# Altium PCB LimeSDR-Mini_2v5_Rounded.PcbDoc (part 2 of 7)
Units mm, origin at the board's own origin, x right, y up, seen from the top; angles counter-clockwise.
Board outline 69 x 31.37 mm, 8 copper layers (Top, L2, L3, L4, L5, L6, L7, Bottom), stack 1.555 mm thick; 439 components, 294 nets, 1986 pads, 831 vias.
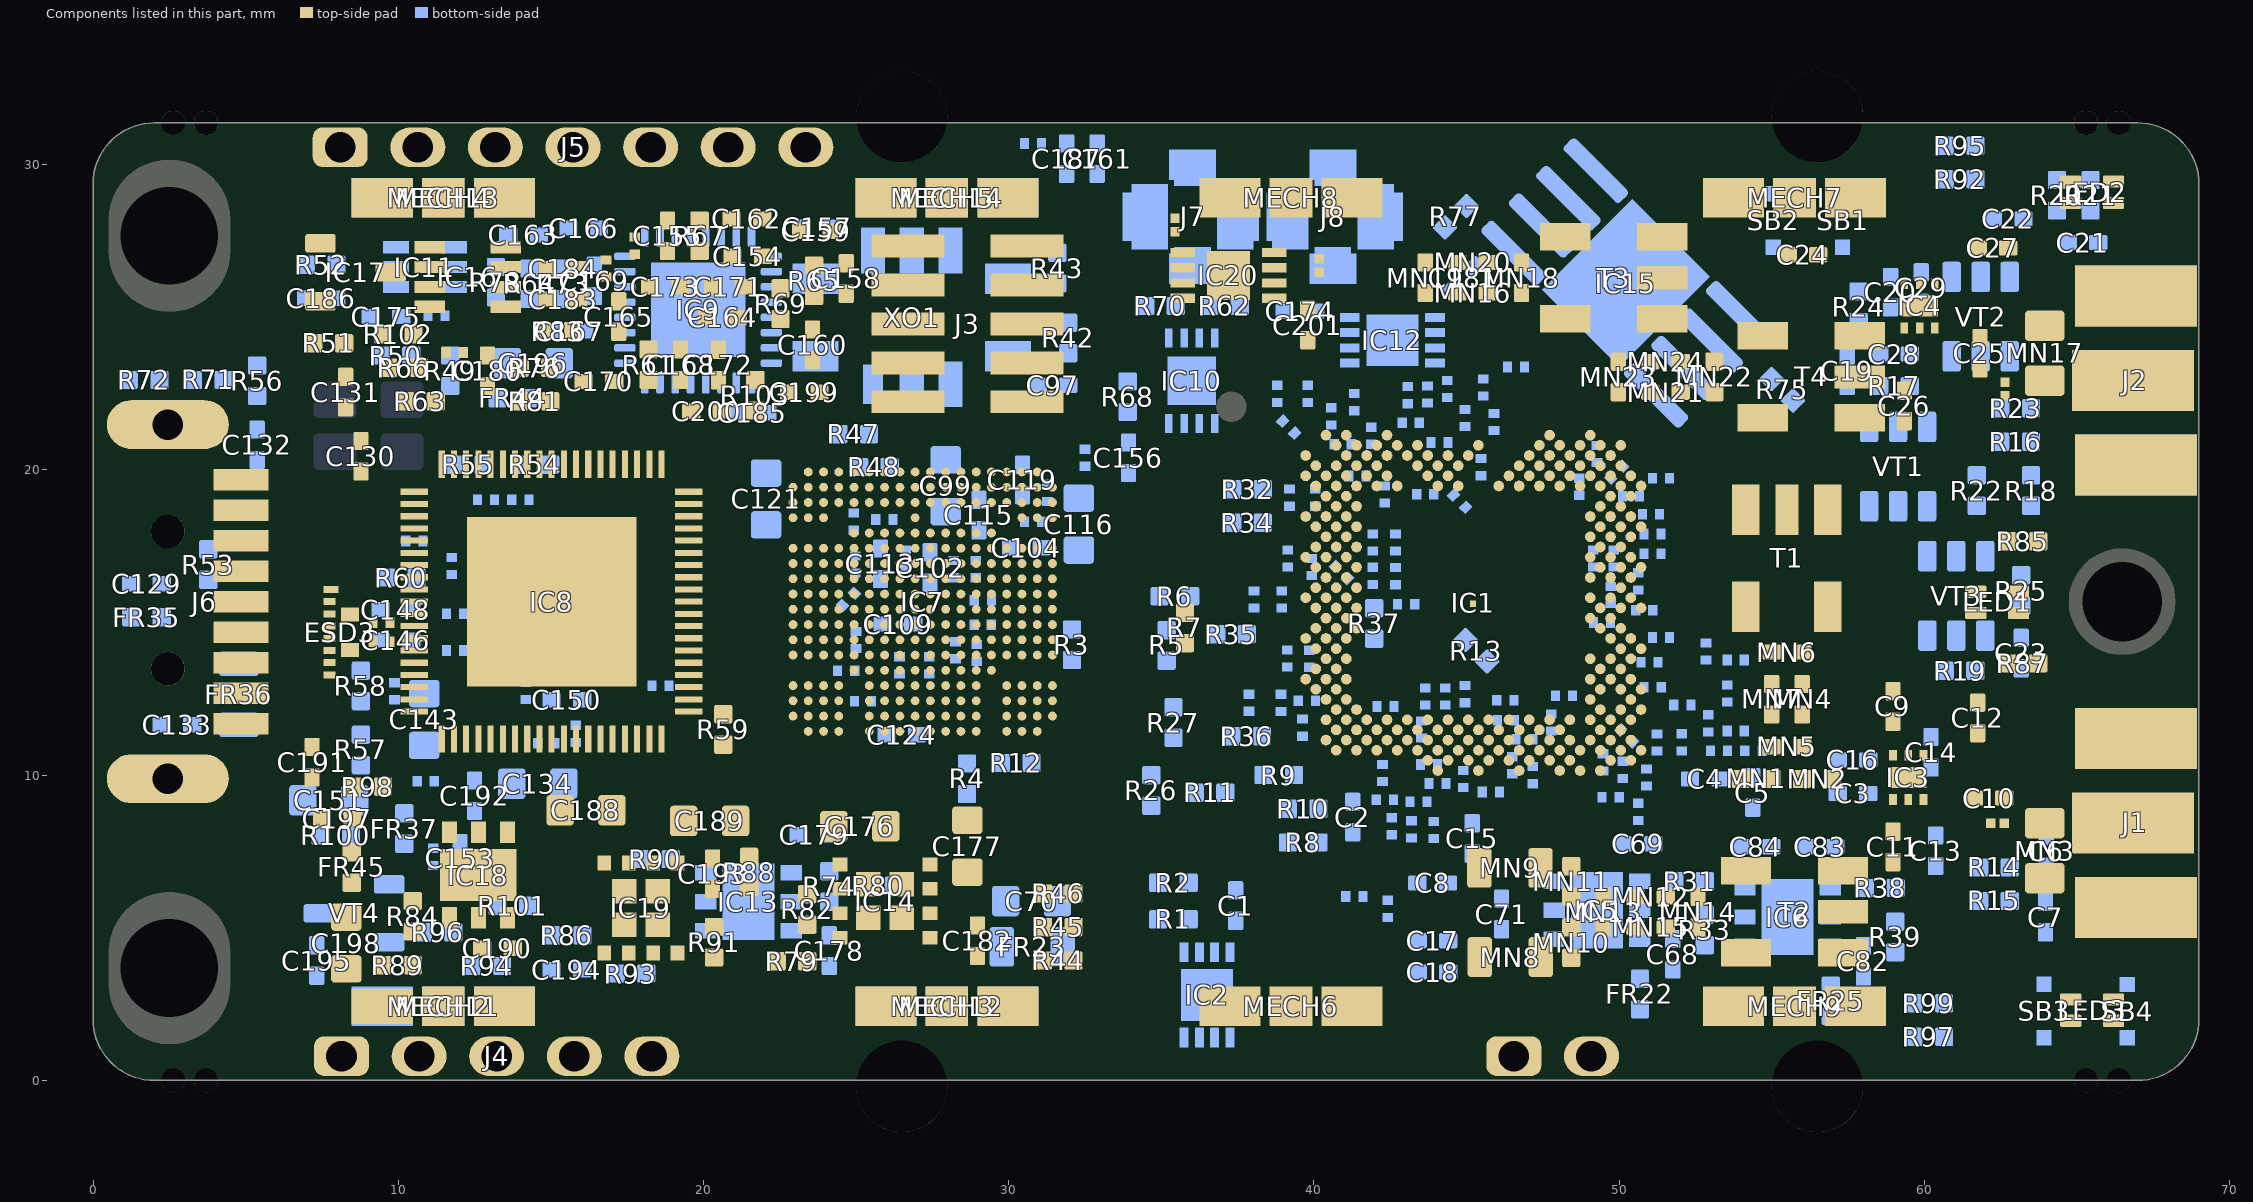
[diagram p8: the components of this part, seen from the top]

## Footprints (in the part's own frame and the unit in brackets; to place one, negate y for a bottom-side part, rotate by r counter-clockwise, add the part's x,y. Pads: shape width x height; smd on the part's side, far side on the other; paste and mask are expansions set on the pad) (continued)
LFE5U-25F-8MG285C_LATTICE_FPGA [mm] "285-ball csfBGA (MG285)"
  round 0.29 smd mask+0.05: A2(-3.75,4.25) A3(-3.25,4.25) A4(-2.75,4.25) A6(-1.75,4.25) A7(-1.25,4.25) A8(-0.75,4.25) A9(-0.25,4.25) A10(0.25,4.25) A11(0.75,4.25) A12(1.25,4.25) A13(1.75,4.25) A15(2.75,4.25) A16(3.25,4.25) A17(3.75,4.25) B1(-4.25,3.75) B2(-3.75,3.75) B3(-3.25,3.75) B4(-2.75,3.75) B6(-1.75,3.75) B7(-1.25,3.75) B8(-0.75,3.75) B9(-0.25,3.75) B10(0.25,3.75) B11(0.75,3.75) B12(1.25,3.75) B13(1.75,3.75) B15(2.75,3.75) B16(3.25,3.75) B17(3.75,3.75) B18(4.25,3.75) C1(-4.25,3.25) C2(-3.75,3.25) C3(-3.25,3.25) C4(-2.75,3.25) C6(-1.75,3.25) C7(-1.25,3.25) C8(-0.75,3.25) C9(-0.25,3.25) C10(0.25,3.25) C11(0.75,3.25) C12(1.25,3.25) C13(1.75,3.25) C15(2.75,3.25) C16(3.25,3.25) C17(3.75,3.25) C18(4.25,3.25) D1(-4.25,2.75) D2(-3.75,2.75) D3(-3.25,2.75) D4(-2.75,2.75) D6(-1.75,2.75) D7(-1.25,2.75) D8(-0.75,2.75) D9(-0.25,2.75) D10(0.25,2.75) D11(0.75,2.75) D12(1.25,2.75) D13(1.75,2.75) D15(2.75,2.75) D16(3.25,2.75) D17(3.75,2.75) D18(4.25,2.75) E5(-2.25,2.25) E6(-1.75,2.25) E7(-1.25,2.25) E8(-0.75,2.25) E9(-0.25,2.25) E10(0.25,2.25) E11(0.75,2.25) E12(1.25,2.25) E13(1.75,2.25) E14(2.25,2.25) F1(-4.25,1.75) F2(-3.75,1.75) F3(-3.25,1.75) F4(-2.75,1.75) F5(-2.25,1.75) F6(-1.75,1.75) F7(-1.25,1.75) F8(-0.75,1.75) F9(-0.25,1.75) F10(0.25,1.75) F11(0.75,1.75) F12(1.25,1.75) F13(1.75,1.75) F14(2.25,1.75) F15(2.75,1.75) F16(3.25,1.75) F17(3.75,1.75) F18(4.25,1.75) G1(-4.25,1.25) G2(-3.75,1.25) G3(-3.25,1.25) G4(-2.75,1.25) G5(-2.25,1.25) G6(-1.75,1.25) G7(-1.25,1.25) G8(-0.75,1.25) G9(-0.25,1.25) G10(0.25,1.25) G11(0.75,1.25) G12(1.25,1.25) G13(1.75,1.25) G14(2.25,1.25) G15(2.75,1.25) G16(3.25,1.25) G17(3.75,1.25) G18(4.25,1.25) H1(-4.25,0.75) H2(-3.75,0.75) H3(-3.25,0.75) H4(-2.75,0.75) H5(-2.25,0.75) H6(-1.75,0.75) H7(-1.25,0.75) H8(-0.75,0.75) H9(-0.25,0.75) H10(0.25,0.75) H11(0.75,0.75) H12(1.25,0.75) H13(1.75,0.75) H14(2.25,0.75) H15(2.75,0.75) H16(3.25,0.75) H17(3.75,0.75) H18(4.25,0.75) J1(-4.25,0.25) J2(-3.75,0.25) J3(-3.25,0.25) J4(-2.75,0.25) J5(-2.25,0.25) J6(-1.75,0.25) J7(-1.25,0.25) J8(-0.75,0.25) J9(-0.25,0.25) J10(0.25,0.25) J11(0.75,0.25) J12(1.25,0.25) J13(1.75,0.25) J14(2.25,0.25) J15(2.75,0.25) J16(3.25,0.25) J17(3.75,0.25) J18(4.25,0.25) K1(-4.25,-0.25) K2(-3.75,-0.25) K3(-3.25,-0.25) K4(-2.75,-0.25) K5(-2.25,-0.25) K6(-1.75,-0.25) K7(-1.25,-0.25) K8(-0.75,-0.25) K9(-0.25,-0.25) K10(0.25,-0.25) K11(0.75,-0.25) K12(1.25,-0.25) K13(1.75,-0.25) K14(2.25,-0.25) K15(2.75,-0.25) K16(3.25,-0.25) K17(3.75,-0.25) K18(4.25,-0.25) L1(-4.25,-0.75) L2(-3.75,-0.75) L3(-3.25,-0.75) L4(-2.75,-0.75) L5(-2.25,-0.75) L6(-1.75,-0.75) L7(-1.25,-0.75) L8(-0.75,-0.75) L9(-0.25,-0.75) L10(0.25,-0.75) L11(0.75,-0.75) L12(1.25,-0.75) L13(1.75,-0.75) L14(2.25,-0.75) L15(2.75,-0.75) L16(3.25,-0.75) L17(3.75,-0.75) L18(4.25,-0.75) M1(-4.25,-1.25) M2(-3.75,-1.25) M3(-3.25,-1.25) M4(-2.75,-1.25) M5(-2.25,-1.25) M6(-1.75,-1.25) M7(-1.25,-1.25) M8(-0.75,-1.25) M9(-0.25,-1.25) M10(0.25,-1.25) M11(0.75,-1.25) M12(1.25,-1.25) M13(1.75,-1.25) M14(2.25,-1.25) M15(2.75,-1.25) M16(3.25,-1.25) M17(3.75,-1.25) M18(4.25,-1.25) N1(-4.25,-1.75) N2(-3.75,-1.75) N3(-3.25,-1.75) N4(-2.75,-1.75) N5(-2.25,-1.75) N6(-1.75,-1.75) N7(-1.25,-1.75) N8(-0.75,-1.75) N9(-0.25,-1.75) N10(0.25,-1.75) N11(0.75,-1.75) N12(1.25,-1.75) N13(1.75,-1.75) N14(2.25,-1.75) N15(2.75,-1.75) N16(3.25,-1.75) N17(3.75,-1.75) N18(4.25,-1.75) P5(-2.25,-2.25) P6(-1.75,-2.25) P7(-1.25,-2.25) P8(-0.75,-2.25) P9(-0.25,-2.25) P10(0.25,-2.25) P11(0.75,-2.25) P12(1.25,-2.25) P13(1.75,-2.25) P14(2.25,-2.25) R1(-4.25,-2.75) R2(-3.75,-2.75) R3(-3.25,-2.75) R10(0.25,-2.75) R16(3.25,-2.75) R17(3.75,-2.75) R18(4.25,-2.75) T1(-4.25,-3.25) T2(-3.75,-3.25) T3(-3.25,-3.25) T4(-2.75,-3.25) T5(-2.25,-3.25) T6(-1.75,-3.25) T7(-1.25,-3.25) T8(-0.75,-3.25) T9(-0.25,-3.25) T10(0.25,-3.25) T11(0.75,-3.25) T12(1.25,-3.25) T13(1.75,-3.25) T14(2.25,-3.25) T15(2.75,-3.25) T16(3.25,-3.25) T17(3.75,-3.25) T18(4.25,-3.25) U1(-4.25,-3.75) U2(-3.75,-3.75) U3(-3.25,-3.75) U4(-2.75,-3.75) U5(-2.25,-3.75) U6(-1.75,-3.75) U7(-1.25,-3.75) U8(-0.75,-3.75) U9(-0.25,-3.75) U10(0.25,-3.75) U11(0.75,-3.75) U12(1.25,-3.75) U13(1.75,-3.75) U14(2.25,-3.75) U15(2.75,-3.75) U16(3.25,-3.75) U17(3.75,-3.75) U18(4.25,-3.75) V2(-3.75,-4.25) V3(-3.25,-4.25) V4(-2.75,-4.25) V5(-2.25,-4.25) V6(-1.75,-4.25) V7(-1.25,-4.25) V8(-0.75,-4.25) V9(-0.25,-4.25) V10(0.25,-4.25) V11(0.75,-4.25) V12(1.25,-4.25) V13(1.75,-4.25) V14(2.25,-4.25) V15(2.75,-4.25) V16(3.25,-4.25) V17(3.75,-4.25)
  silkscreen extent -5.1,-5 5,5.1, body extent -5,-5 5,5, height 1.3
LMK00101_WQFN32_r1 [mm] "QFN, 24-Leads, Body 4,00x4,00mm, Pitch 0,50mm, Thermal Pad 2,55x2,55mm, IPC Medium Density"
  rrect50% 0.7x0.25 smd mask+0.05: 1(-2.4,1.75) 2(-2.4,1.25) 3(-2.4,0.75) 4(-2.4,0.25) 5(-2.4,-0.25) 6(-2.4,-0.75) 7(-2.4,-1.25) 8(-2.4,-1.75) 17(2.4,-1.75) 18(2.4,-1.25) 19(2.4,-0.75) 20(2.4,-0.25) 21(2.4,0.25) 22(2.4,0.75) 23(2.4,1.25) 24(2.4,1.75)
  rect 3.1x3.1 smd mask+0.05: 4(0,0)
  rrect50% 0.25x0.7 smd mask+0.05: 9(-1.75,-2.4) 10(-1.25,-2.4) 11(-0.75,-2.4) 12(-0.25,-2.4) 13(0.25,-2.4) 14(0.75,-2.4) 15(1.25,-2.4) 16(1.75,-2.4) 25(1.75,2.4) 26(1.25,2.4) 27(0.75,2.4) 28(0.25,2.4) 29(-0.25,2.4) 30(-0.75,2.4) 31(-1.25,2.4) 32(-1.75,2.4)
  silkscreen extent -2.8,-2.8 2.8,2.8, body extent -2.52,-2.51 2.5,2.51, height 0.8
LMS7002M_v5 [mm] "LMS7002 without AM2 pad (internally unconnected)"
  round 0.35 smd mask+0: A5(-3.998,5.49) A7(-3.332,5.49) A9(-2.666,5.49) A13(-1.334,5.49) A17(-0.002,5.49) A21(1.33,5.49) AA1(-5.33,-1.17) AA3(-4.664,-1.17) AA5(-3.998,-1.17) AA29(3.994,-1.17) AA31(4.66,-1.17) AA33(5.326,-1.17) AB2(-4.997,-1.503) AB4(-4.331,-1.503) AB6(-3.665,-1.503) AB30(4.327,-1.503) AB32(4.993,-1.503) AB34(5.659,-1.503) AC3(-4.664,-1.836) AC5(-3.998,-1.836) AC29(3.994,-1.836) AC31(4.66,-1.836) AC33(5.326,-1.836) AD2(-4.997,-2.169) AD4(-4.331,-2.169) AD6(-3.665,-2.169) AD30(4.327,-2.169) AD32(4.993,-2.169) AE1(-5.33,-2.502) AE3(-4.664,-2.502) AE5(-3.998,-2.502) AE29(3.994,-2.502) AE31(4.66,-2.502) AE33(5.326,-2.502) AF2(-4.997,-2.835) AF4(-4.331,-2.835) AF6(-3.665,-2.835) AF30(4.327,-2.835) AF32(4.993,-2.835) AF34(5.659,-2.835) AG3(-4.664,-3.168) AG5(-3.998,-3.168) AG29(3.994,-3.168) AG31(4.66,-3.168) AG33(5.326,-3.168) AH2(-4.997,-3.501) AH4(-4.331,-3.501) AH30(4.327,-3.501) AH32(4.993,-3.501) AJ1(-5.33,-3.834) AJ3(-4.664,-3.834) AJ5(-3.998,-3.834) AJ7(-3.332,-3.834) AJ9(-2.666,-3.834) AJ11(-2,-3.834) AJ13(-1.334,-3.834) AJ15(-0.668,-3.834) AJ19(0.664,-3.834) AJ21(1.33,-3.834) AJ25(2.662,-3.834) AJ27(3.328,-3.834) AJ29(3.994,-3.834) AJ31(4.66,-3.834) AJ33(5.326,-3.834) AK2(-4.997,-4.167) AK4(-4.331,-4.167) AK6(-3.665,-4.167) AK8(-2.999,-4.167) AK10(-2.333,-4.167) AK12(-1.667,-4.167) AK14(-1.001,-4.167) AK20(0.997,-4.167) AK22(1.663,-4.167) AK26(2.995,-4.167) AK28(3.661,-4.167) AK30(4.327,-4.167) AK32(4.993,-4.167) AK34(5.659,-4.167) AL3(-4.664,-4.5) AL5(-3.998,-4.5) AL7(-3.332,-4.5) AL9(-2.666,-4.5) AL11(-2,-4.5) AL13(-1.334,-4.5) AL19(0.664,-4.5) AL21(1.33,-4.5) AL23(1.996,-4.5) AL27(3.328,-4.5) AL29(3.994,-4.5) AL31(4.66,-4.5) AL33(5.326,-4.5) AM4(-4.331,-4.833) AM6(-3.665,-4.833) AM8(-2.999,-4.833) AM10(-2.333,-4.833) AM12(-1.667,-4.833) AM18(0.331,-4.833) AM20(0.997,-4.833) AM22(1.663,-4.833) AM24(2.329,-4.833) AM26(2.995,-4.833) AM28(3.661,-4.833) AM30(4.327,-4.833) AM34(5.659,-4.833) AN3(-4.664,-5.166) AN5(-3.998,-5.166) AN7(-3.332,-5.166) AN9(-2.666,-5.166) AN11(-2,-5.166) AN17(-0.002,-5.166) AN23(1.996,-5.166) AN25(2.662,-5.166) AN27(3.328,-5.166) AN29(3.994,-5.166) AN31(4.66,-5.166) AP6(-3.665,-5.499) AP10(-2.333,-5.499) AP26(2.995,-5.499) AP30(4.327,-5.499) AP32(4.993,-5.499) B2(-4.997,5.157) B4(-4.331,5.157) B8(-2.999,5.157) B10(-2.333,5.157) B12(-1.667,5.157) B14(-1.001,5.157) B16(-0.335,5.157) B18(0.331,5.157) B20(0.997,5.157) B22(1.663,5.157) C1(-5.33,4.824) C3(-4.664,4.824) C5(-3.998,4.824) C7(-3.332,4.824) C9(-2.666,4.824) C11(-2,4.824) C13(-1.334,4.824) C15(-0.668,4.824) C17(-0.002,4.824) C19(0.664,4.824) C21(1.33,4.824) C23(1.996,4.824) C25(2.662,4.824) C27(3.328,4.824) C29(3.994,4.824) C31(4.66,4.824) D2(-4.997,4.491) D4(-4.331,4.491) D6(-3.665,4.491) D8(-2.999,4.491) D10(-2.333,4.491) D12(-1.667,4.491) D14(-1.001,4.491) D16(-0.335,4.491) D18(0.331,4.491) D20(0.997,4.491) D22(1.663,4.491) D24(2.329,4.491) D26(2.995,4.491) D28(3.661,4.491) D30(4.327,4.491) D32(4.993,4.491) E3(-4.664,4.158) E5(-3.998,4.158) E9(-2.666,4.158) E11(-2,4.158) E13(-1.334,4.158) E15(-0.668,4.158) E17(-0.002,4.158) E19(0.664,4.158) E21(1.33,4.158) E23(1.996,4.158) E25(2.662,4.158) E27(3.328,4.158) E29(3.994,4.158) E31(4.66,4.158) F2(-4.997,3.825) F4(-4.331,3.825) F6(-3.665,3.825) F8(-2.999,3.825) F10(-2.333,3.825) F12(-1.667,3.825) F14(-1.001,3.825) F16(-0.335,3.825) F18(0.331,3.825) F20(0.997,3.825) F22(1.663,3.825) F24(2.329,3.825) F26(2.995,3.825) F28(3.661,3.825) F30(4.327,3.825) F32(4.993,3.825) G1(-5.33,3.492) G3(-4.664,3.492) G5(-3.998,3.492) G29(3.994,3.492) G31(4.66,3.492) H2(-4.997,3.159) H6(-3.665,3.159) H30(4.327,3.159) H32(4.993,3.159) J1(-5.33,2.826) J3(-4.664,2.826) J5(-3.998,2.826) J31(4.66,2.826) J33(5.326,2.826) K2(-4.997,2.493) K4(-4.331,2.493) K6(-3.665,2.493) K30(4.327,2.493) K32(4.993,2.493) K34(5.659,2.493) L3(-4.664,2.16) L5(-3.998,2.16) L31(4.66,2.16) L33(5.326,2.16) M2(-4.997,1.827) M4(-4.331,1.827) M6(-3.665,1.827) M30(4.327,1.827) M32(4.993,1.827) N1(-5.33,1.494) N3(-4.664,1.494) N31(4.66,1.494) N33(5.326,1.494) P2(-4.997,1.161) P4(-4.331,1.161) P30(4.327,1.161) P32(4.993,1.161) P34(5.659,1.161) R3(-4.664,0.828) R5(-3.998,0.828) R29(3.994,0.828) R31(4.66,0.828) R33(5.326,0.828) T4(-4.331,0.495) T6(-3.665,0.495) T30(4.327,0.495) T32(4.993,0.495) U1(-5.33,0.162) U3(-4.664,0.162) U5(-3.998,0.162) U29(3.994,0.162) U31(4.66,0.162) U33(5.326,0.162) V2(-4.997,-0.171) V4(-4.331,-0.171) V6(-3.665,-0.171) V30(4.327,-0.171) V32(4.993,-0.171) V34(5.659,-0.171) W3(-4.664,-0.504) W29(3.994,-0.504) W31(4.66,-0.504) W33(5.326,-0.504) Y2(-4.997,-0.837) Y4(-4.331,-0.837) Y6(-3.665,-0.837) Y30(4.327,-0.837) Y32(4.993,-0.837)
  rect 0.2x0.2 smd: GND(0.175,0.025)
  Top region: -3.325,-3.5 3.675,-3.5 3.675,3.5 -3.325,3.5
  silkscreen extent -6.1,-6.3 6.4,6.2, body extent -5.6,-5.75 5.9,5.75, height 0.97
LMZ20501SILR_DC-DC_8-SMD [mm]
  rect 0.5x0.45 smd mask+0.05: 1(-1.475,1.2) 2(-1.475,0.4) 3(-1.475,-0.4) 4(-1.475,-1.2) 5(1.475,-1.2) 6(1.475,-0.4) 7(1.475,0.4) 8(1.475,1.2)
  rect 0.8x0.8 smd mask+0.05: PAD(-0.55,0.55) PAD(-0.55,-0.55) PAD(0.55,-0.55) PAD(0.55,0.55)
  silkscreen extent -2.17,-1.85 1.88,1.85, body extent -1.9,-1.9 1.9,1.9, height 0.25
M24128-DFMC6TG [mm] "8-UFDFPN (2x3)"
  rect 0.65x0.3 smd mask+0.05: 1(-1.4,0.75) 2(-1.4,0.25) 3(-1.4,-0.25) 4(-1.4,-0.75) 5(1.4,-0.75) 6(1.4,-0.25) 7(1.4,0.25) 8(1.4,0.75)
  rect 1.7x1.7 smd mask+0.05: PAD(0,0)
  silkscreen extent -2.06,-1.1 0.9,1.1, body extent -1.52,-1.01 1.52,0.99, height 0.9
MMCX_UFL_conn_u#1 [mm]
  rect 1.2x1.2 smd mask+0.05: 1(0,1.6) 2(0,-1.6)
  rect 1.55x1 smd mask+0.05: 1(0,1.7) 2(0,-1.7)
  rect 1.2x1.6 smd mask+0.05: 2(-1.7,0)
  rect 1.2x2.15 smd mask+0.05: 2(-1.4,0) 2(1.4,0)
  rect 0.95x1.6 smd mask+0.05: 2(1.7,0)
  silkscreen extent -2.3,-2.2 2.3,2.2, body extent -1.5,-1.55 1.5,1.55, height 1.25
MMCX_UFL_conn_u#2 [mm]
  rect 1.2x1.2 smd mask+0.05: 1(0,1.6) 2(0,-1.6)
  rect 1.55x1 smd mask+0.05: 1(0,1.7) 2(0,-1.7)
  rect 0.95x1.6 smd mask+0.05: 2(-1.7,0)
  rect 1.2x2.15 smd mask+0.05: 2(-1.4,0) 2(1.4,0)
  rect 1.2x1.6 smd mask+0.05: 2(1.7,0)
  silkscreen extent -2.3,-2.2 2.3,2.2, body extent -1.5,-1.55 1.5,1.55, height 1.25
RES0201#1 [mm]
  rect 0.3x0.35 smd: 1(-0.28,0) 2(0.28,0)
  silkscreen extent -0.2,-0.33 0.2,0.33, body extent -0.3,-0.15 0.3,0.15, height 0.25
RES0201#2 [mm]
  rect 0.3x0.35 smd mask+0.05: 1(-0.28,0) 2(0.28,0)
  silkscreen extent -0.2,-0.33 0.2,0.33, body extent -0.3,-0.15 0.3,0.15, height 0.25
RES0402#1 [mm] "Chip Resistor, Body 1.0x0.5mm, EIA 0402, IPC Medium Density"
  round 0.2 on Mech14: 0(0,0)
  rrect20% 0.6x0.6 smd: 1(-0.5,0) 2(0.5,0)
  Top pour cut-out: -0.2,0.35 0.2,0.35 0.2,-0.35 -0.2,-0.35
  silkscreen extent -1.05,-0.55 1.05,0.55, body extent -0.52,-0.27 0.53,0.28, height 0.4
RES0402#2 [mm] "Chip Resistor, Body 1.0x0.5mm, EIA 0402, IPC Medium Density"
  round 0.2 on Mech15: 0(0,0)
  rrect20% 0.6x0.6 smd: 1(-0.5,0) 2(0.5,0)
  Top pour cut-out: -0.2,0.35 0.2,0.35 0.2,-0.35 -0.2,-0.35
  silkscreen extent -1.05,-0.55 1.05,0.55, body extent -0.52,-0.27 0.53,0.28, height 0.4
RES0805#1 [mm] "Chip Resistor, Body 2.0x1.2mm, 0805, IPC Medium Density"
  round 0.254 on Mech14: 0(0,0)
  rrect25% 0.8x1.3 smd: 1(-1,0) 2(1,0)
  Top pour cut-out: -0.6,0.75 0.6,0.75 0.6,-0.75 -0.6,-0.75
  silkscreen extent -0.38,-0.64 0.38,0.64, body extent -1.1,-0.67 1.1,0.68, height 0.69
RES0805#2 [mm] "Chip Resistor, Body 2.0x1.2mm, 0805, IPC Medium Density"
  round 0.254 on Mech15: 0(0,0)
  rrect25% 0.8x1.3 smd: 1(-1,0) 2(1,0)
  Top pour cut-out: -0.6,0.75 0.6,0.75 0.6,-0.75 -0.6,-0.75
  silkscreen extent -0.38,-0.64 0.38,0.64, body extent -1.1,-0.67 1.1,0.68, height 0.69
RES0805_0603 [mm] "Universal 0805 0603 footprint"
  round 0.254 on Mech15: 0(0,0)
  rrect25% 1x1.3 smd: 1(-0.9,0) 2(0.9,0)
  Top pour cut-out: -0.4,0.725 0.4,0.725 0.4,-0.775 -0.4,-0.775
  silkscreen extent -0.22,-0.7 0.23,0.7, body extent -1.1,-0.67 1.1,0.68, height 0.69
RFI_SHIELD_CLPS_MINI#1 [mm] "RFI SHIELD CLIP MINI TIN SMD, S0971-46R"
  rect 2x1.3 smd paste-2 mask+0.05: 1(-2,0)
  rect 1.4x1.3 smd paste-2 mask+0.05: 1(0,0)
  rect 2x1.15 smd paste-2 mask+0.05: 1(2,0)
  body extent -2.9,-0.5 2.9,0.5, height 1
RFI_SHIELD_CLPS_MINI#2 [mm] "RFI SHIELD CLIP MINI TIN SMD, S0971-46R"
  rect 2x1.3 smd paste-2 mask+0.05: 1(-2,0) 1(2,0)
  rect 1.4x1.3 smd paste-2 mask+0.05: 1(0,0)
  body extent -2.9,-0.5 2.9,0.5, height 1
RFI_SHIELD_CLPS_MINI#3 [mm] "RFI SHIELD CLIP MINI TIN SMD, S0971-46R"
  rect 2x1.3 smd paste+0 mask+0.05: 1(-2,0) 1(2,0)
  rect 1.4x1.3 smd paste+0 mask+0.05: 1(0,0)
  body extent -2.9,-0.5 2.9,0.5, height 1
RFI_SHIELD_CLPS_MINI#4 [mm] "RFI SHIELD CLIP MINI TIN SMD, S0971-46R"
  rect 2x1.3 smd mask+0.05: 1(-2,0) 1(2,0)
  rect 1.4x1.3 smd mask+0.05: 1(0,0)
  body extent -2.9,-0.5 2.9,0.5, height 1
S25FL164K_WSON8_DFN6 [mm] "WSON8 and DFN8 6x5mm compatible footprint"
  rrect50% 2.6x0.55 smd mask+0.05: 1(-3.3,1.905) 2(-3.3,0.635) 3(-3.3,-0.635) 4(-3.3,-1.905) 5(3.3,-1.905) 6(3.3,-0.635) 7(3.3,0.635) 8(3.3,1.905)
  rect 3.6x4.2 smd mask+0.05: PAD(0,0)
  silkscreen extent -4.72,-2.7 2,2.72, body extent -4.15,-2.73 3.95,2.73, height 1.75
SKY13411-374LF [mm]
  rect 0.35x0.25 smd mask+0.05: 1(-0.725,0.5) 2(-0.725,0) 3(-0.725,-0.5) 4(0.725,-0.5) 5(0.725,0) 6(0.725,0.5)
  rect 0.7x1.2 smd mask+0.05: PAD(0,0)
  silkscreen extent -1.14,-0.8 0.7,0.86, body extent -0.75,-0.75 0.75,0.75, height 0.48
SMA_CONNECTOR_BOARD_EDGE_SM [mm]
  rect 2x4 smd: 1(0,0) 2(-2.77,-0.1) 2(2.77,-0.1)
  rect 2x4 smd far side: 2(-2.77,-0.1) 2(2.77,-0.1)
  silkscreen extent -4.3,-1.9 4.3,2.5, body extent -3,-11.8 3,1.8, height 3.4
SOLDER_BRIDGE_TRIANGULAR_V2 [mm]
  round 0.254 on Mech14: 0(0,0.125)
  rect 0.5x0.5 smd mask+0.05: 1(0,-0.95) 2(0,0.8)
  Top region: 0,0.05 -0.625,-0.575 -0.625,-1.45 0,-1.45
  Top region: 0,0.225 -0.625,-0.4 -0.625,1.05 0,1.05
  Top region: 0,0.225 0.625,-0.4 0.625,1.05 0,1.05
  Top region: 0,0.05 0.625,-0.575 0.625,-1.45 0,-1.45
  silkscreen extent -0.77,-1.6 0.77,1.2, body extent -0.28,-0.52 0.27,0.53, height 0.4
SOT23-3 [mm] "SOT23, 3 pin"
  round 0.5 on Mech14: 0(0,0)
  rrect25% 1x0.6 smd: D(1.15,0) G(-1.15,0.95) S(-1.15,-0.95)
  silkscreen extent -1.25,-1.45 0.38,1.81, body extent -1.4,-1.45 1.4,1.45, height 1.29
SOT23-3_V3 [mm] "SOT23, 3 pin"
  round 0.5 on Mech15: 0(0,0)
  rrect25% 1x0.6 smd: 1(-1.15,0.95) 2(-1.15,-0.95) 3(1.15,0)
  silkscreen extent -1.2,-1.45 0.38,1.45, body extent -1.4,-1.45 1.4,1.45, height 1.29
SWD_10_pin [mm]
  rect 0.75x2.4 smd paste-2: 1(-2.55,-1.95) 2(-2.55,1.95) 3(-1.275,-1.95) 4(-1.275,1.95) 5(0,-1.95) 6(0,1.95) 7(1.275,-1.95) 8(1.275,1.95) 9(2.55,-1.95) 10(2.55,1.95)
  silkscreen extent -3.2,-3.4 3.2,3.4, body extent -3.17,-2.75 3.17,2.75, height 6.37
T604-040.0M_VCTCXO_CONNORWINFIELD [mm]
  rect 0.8x1.5 smd mask+0.07: 1(-1.27,-2.19) 2(0,-2.19) 6(1.27,2.19) 7(0,2.19) 8(-1.27,2.19)
  rect 0.65x1.3 smd mask+0.07: 3(1.27,-2.19)
  rect 1.5x1 smd mask+0.07: 4(3.155,-1.27) 5(3.155,1.27) 9(-3.155,1.27) 10(-3.155,-1.27)
  silkscreen extent -3.5,-3.02 3.5,2.5, body extent -3.65,-2.65 3.65,2.65, height 2.1
TC1-1-13MA+_JA4220-AL_ [mm] "Balun compatible with TC1-1-13MA+ and JA4220-AL_"
  rect 0.9x1.65 smd: 1(-1.345,1.59) 3(1.345,1.59) 4(1.345,-1.59) 6(-1.345,-1.59)
  rect 0.76x1.65 smd: 2(0,1.59)
  silkscreen extent -2,-0.6 2,0.7, body extent -1.27,-1.61 1.28,1.61, height 2.8
USB3A_SM [mm]
  rect 0.7x1.8 smd: 1(-3,-1.2) 2(-1,-1.2) 3(1,-1.2) 4(3,-1.2) 5(4,-1.2) 6(2,-1.2) 7(0,-1.2) 8(-2,-1.2) 9(-4,-1.2)
  oval 1.6x4 hole 1 slot 2.5 at 90 deg: 10(-5.8,1.2) 10(5.8,1.2)
  round 1.1 hole 1.1 unplated: 11(-2.2,1.2) 11(2.3,1.2)
  silkscreen extent -6.95,-2.55 7.05,3.6, body extent -6,-1.75 6,19, height 1.8
WURTHELECTRONIC_RF_SHIELD [mm] "Man. part nr.: 36003250"
  body extent 0,0 26.8,26.8, height 3.1
WurthElectronic_RF_shield [mm] "Man. part nr.: 36003250"
  body extent 0,0 26.8,26.8, height 3.1
ZVN4525E6_NMOS_SOT23-6 [mm]
  round 0.5 on Mech14: 0(0,0)
  rrect25% 1x0.6 smd: 1(-1.3,0.95) 2(-1.3,0) 3(-1.3,-0.95) 4(1.3,-0.95) 5(1.3,0) 6(1.3,0.95)
  silkscreen extent -1.42,-1.35 0.51,1.81, body extent -1.4,-1.45 1.4,1.45, height 1.44

## Part data
C1 C159 C164 C165 C194: library part Cap_0402, Capacitance=1, Capacitance Tolerance="± 10%", Ceramic Capacitor Case="0402 [1005 Metric]", Dielectric Characteristic=X6, Manufacturer=TDK, Manufacturer Part Number 1=C1005X5R1E105K050BC, Supplier Part Number 1=445-9066-1-ND, Voltage Rating=10, MSL=-, Part Description="1 µF ±10% 25V Ceramic Capacitor X5R 0402 (1005 Metric)", Product Range="TDK - C Series", RoHS=YES, Supplier 1=Digi-Key
  C194: Assembly Info=NF
C2: library part Cap_0402, Capacitance=10, Capacitance Tolerance="± 5%", Capacitor Case Style="0402 [1005 Metric]<!--FANDB--><div class=\"features-and-benefits-container\"></div>", Ceramic Capacitor Case="0402 [1005 Metric]", Dielectric Characteristic="C0G / NP0", Manufacturer=AVX, Manufacturer Part Number 1=04023A100JAT2A, Operating Temperature Max=125, Operating Temperature Min=-55, Supplier Part Number 1=2332478RL, Voltage Rating=25, Capacitance Tolerance ±="± 5%", MSL="MSL 1 - Unlimited", Packaging="Cut Tape", Part Description="10pF ±5% 25V C0G, NP0 Ceramic Capacitor -55°C ~ 125°C Surface Mount, MLCC 0402 (1005 Metric) 0.039\" L x 0.020\" W (1.00mm x 0.50mm)", Product Range=-, RoHS=YES, Supplier 1=Farnell, SVHC="No SVHC (16-Jun-2014)"
C3 C5 C7 C16 C17 C19 C20 C22 C23 C71 C84 C167 C168 C169 C170 C172 C173 C192: library part Cap_0402, Capacitance=100pF, Manufacturer=Yageo, Manufacturer Part Number 1=CC0402JRNPO9BN101, Operating Temperature="-55°C ~ 125°C", Package / Case="0402 (1005 Metric)", Ratings=-, Supplier Part Number 1=311-1024-1-ND, Temperature Coefficient="C0G, NP0", Tolerance=±5%, Voltage - Rated=50V, Applications="General Purpose", Category=Capacitors, Features=-, Height - Seated (Max)=-, Lead Spacing=-, Lead Style=-, Mounting Type="Surface Mount, MLCC", Packaging="Cut Tape (CT)", Part Description="100pF ±5% 50V C0G, NP0 Ceramic Capacitor -55°C ~ 125°C Surface Mount, MLCC 0402 (1005 Metric) 0.039\" L x 0.020\" W (1.00mm x 0.50mm)", RoHS="RoHS Compliant", Size / Dimension="0.039\" L x 0.020\" W (1.00mm x 0.50mm)", Supplier 1=Digi-Key, Thickness (Max)="0.022\" (0.55mm)"
  C7 C19 C20 C22 C71 C84 C192: Assembly Info=NF
C4 C6 C8 C15 C18 C21 C97 C153 C154 C155 C161 C162 C163 C166 C171 C185 C199 C200 MN12 MN15: library part Cap_0402, Capacitance="0.1 uF", Case Code - in=0402, Case Code - mm=1005, Case Height="0.5 mm", Case Length="1 mm", Dielectric=X7R, Manufacturer="Murata Electronics", Manufacturer Part Number=GRM155R71C104KA88D, Maximum Operating Temperature="+ 125 C", Minimum Operating Temperature="- 55 C", Operating Temperature Range="- 55 C to + 125 C", Package / Case="0402 (1005 metric)", Supplier Part Number 1=81-GRM155R71C104KA88, Temperature Coefficient / Code="+/- 15 %", Tolerance="10 %", Voltage Rating DC="16 V", Brand="Murata Electronics", Case Width="0.5 mm", Category="Multilayer Ceramic Capacitors MLCC - SMD/SMT", Manufacturer Part Number 1=GRM155R71C104KA88D, Minimum Order Quantity=1, Packaging=Reel, Part Description="0.10µF ±10% 16V X7R Ceramic Capacitor -55°C ~ 125°C Surface Mount, MLCC 0402 (1005 Metric) 0.039\" L x 0.020\" W (1.00mm x 0.50mm)", Product="General Type MLCCs", Product Category="Low & Medium Capacitance SMD Ceramic Chip Capacitors", Reeling=True, RoHS="RoHS Compliant", RoHS - Mouser=Y, Series=GRM, Standard Pack Qty=10000, Supplier 1=Mouser, Termination Style=SMD/SMT, Type="General Purpose MLCC"
  C6 C21: Assembly Info=NF
C9 C12 C24 C27 C158 C160: library part Cap_0402, Capacitance=47pF, Manufacturer="TDK Corporation", Manufacturer Part Number 1=GRM1555C1H470FA01D, Operating Temperature="-55°C ~ 125°C", Package / Case="0402 (1005 Metric)", Ratings=-, Supplier Part Number 1=490-6241-1-ND, Temperature Coefficient="C0G, NP0", Tolerance=±1%, Voltage - Rated=50V, Applications="General Purpose", Category=Capacitors, Features=-, Height - Seated (Max)=-, Lead Spacing=-, Lead Style=-, Mounting Type="Surface Mount, MLCC", Packaging="Cut Tape (CT)", Part Description="47pF ±1% 50V C0G, NP0 Ceramic Capacitor -55°C ~ 125°C Surface Mount, MLCC 0402 (1005 Metric) 0.039\" L x 0.020\" W (1.00mm x 0.50mm)", RoHS="RoHS Compliant", Size / Dimension="0.039\" L x 0.020\" W (1.00mm x 0.50mm)", Supplier 1=Digi-Key, Thickness (Max)="0.022\" (0.55mm)"
  C158 C160: Assembly Info=NF
C10 C11 C25 C26 MN21 MN24: library part Cap_0402, Manufacturer="Murata Electronics North America", Manufacturer Part Number 1=GRM1555C1H511JA01D, Operating Temperature="-55°C ~ 125°C", Package / Case="0402 (1005 Metric)", Ratings=-, Supplier Part Number 1=490-3237-1-ND, Temperature Coefficient="C0G, NP0", Tolerance=±5%, Voltage - Rated=50V, Applications="General Purpose", Capacitance=510pF, Category=Capacitors, Features=-, Height - Seated (Max)=-, Lead Spacing=-, Lead Style=-, Mounting Type="Surface Mount, MLCC", Packaging="Cut Tape (CT)", Part Description="510pF ±5% 50V C0G, NP0 Ceramic Capacitor -55°C ~ 125°C Surface Mount, MLCC 0402 (1005 Metric) 0.039\" L x 0.020\" W (1.00mm x 0.50mm)", RoHS="RoHS Compliant", Size / Dimension="0.039\" L x 0.020\" W (1.00mm x 0.50mm)", Supplier 1=Digi-Key, Thickness (Max)="0.022\" (0.55mm)"
C13 C14 C28 C29 C102 C104 C109 C113 C115 C119 C124 C146 C148 C150 C187: library part Cap_0402, Capacitance=10nF, Case/Package=0402, Case Code (Metric)=1005, Dielectric=X7R, Manufacturer=Murata, Manufacturer Part Number 1=GRM155R71H103KA88D, Max Operating Temperature=125°C, Min Operating Temperature=-55°C, Package Quantity=1, Supplier Part Number 1=490-4516-1-ND, Tolerance=10%, Voltage=25V, Voltage Rating=50V, Case Code (Imperial)=0402, Depth=0.5mm, Height=0.5mm, Lead Free="Lead Free", Length=1mm, Material=Ceramic, Mount="Surface Mount", Number of Pins=2, Packaging="Tape and Reel", Part Description="10000pF ±10% 50V Ceramic Capacitor X7R 0402 (1005 Metric)", Pricing 1="1=0,10000, 10=0,03800, 100=0,01690, 500=0,01208, 1000=0,00949, 2500=0,00862, 5000=0,00794 (USD)", Radiation Hardening=No, REACH SVHC="No SVHC", RoHS=Yes, Stock 1=8941817, Supplier 1=Digi-Key, Termination=SMD/SMT, Thickness=0.022inch, Voltage Rating (DC)=50V, Width=0.02inch
C30 C32 C33 C34 C35 C36 C37 C39 C41 C43 C44 C45 C46 C48 C49 C50 C51 C52 C53 C54 C55 C56 C57 C58 C59 C60 C62 C63 C64 C65 C66 C67 C73 C75 C77 C79 C81 C85 C86 C87 C88 C89 C90 C91 C92 C93 C94 C95 C96 C100 C111 C117 C122 C135 C137 C139 C141 C144 C152: library part Cap_0402, Capacitance=1.0µF, Manufacturer="TDK Corporation", Manufacturer Part Number 1=JMK063ABJ105MP-F, Operating Temperature="-55°C ~ 85°C", Package / Case="0201 (0603 Metric)", Ratings=-, Supplier Part Number 1=587-5864-2-ND, Temperature Coefficient=X5R, Tolerance=±20%, Voltage - Rated=6.3V, Applications="General Purpose", Category=Capacitors, Features=-, Height - Seated (Max)=-, Lead Spacing=-, Lead Style=-, Mounting Type="Surface Mount, MLCC", Packaging="Cut Tape (CT)", Part Description="1µF ±20% 6.3V X5R Ceramic Capacitor -55°C ~ 85°C Surface Mount, MLCC 0201 (0603 Metric) 0.024\" L x 0.012\" W (0.60mm x 0.30mm)", RoHS="RoHS Compliant", Size / Dimension="0.024\" L x 0.012\" W (0.60mm x 0.30mm)", Supplier 1=Digi-Key, Thickness (Max)=-
C31 C38 C40 C42 C47 C61 C72 C74 C76 C78 C80: library part Cap_0402, Capacitance=1000pF, Manufacturer="TDK Corporation", Manufacturer Part Number 1=C0603X7R1E102K030BA, Operating Temperature="-55°C ~ 125°C", Package / Case="0201 (0603 Metric)", Ratings=-, Supplier Part Number 1=445-7275-1-ND, Temperature Coefficient=X7R, Tolerance=±10%, Voltage - Rated=25V, Applications="General Purpose", Category=Capacitors, Features=-, Height - Seated (Max)=-, Lead Spacing=-, Lead Style=-, Mounting Type="Surface Mount, MLCC", Packaging="Cut Tape (CT)", Part Description="1000pF ±10% 25V X7R Ceramic Capacitor -55°C ~ 125°C Surface Mount, MLCC 0201 (0603 Metric) 0.024\" L x 0.012\" W (0.60mm x 0.30mm)", RoHS="RoHS Compliant", Size / Dimension="0.024\" L x 0.012\" W (0.60mm x 0.30mm)", Supplier 1=Digi-Key, Thickness (Max)="0.013\" (0.33mm)"
C68 C69 C82 C83 C178 C179 C190 C191 C197: library part Cap_0402, Capacitance=4.7µF, Manufacturer="Murata Electronics North America", Manufacturer Part Number 1=GRM155R60J475ME87D, Operating Temperature="-55°C ~ 85°C", Package / Case="0402 (1005 Metric)", Ratings=-, Supplier Part Number 1=490-5408-1-ND, Temperature Coefficient=X5R, Tolerance=±20%, Voltage - Rated=6.3V, Applications="General Purpose", Category=Capacitors, Features="Derating Recommended", Height - Seated (Max)=-, Lead Spacing=-, Lead Style=-, Mounting Type="Surface Mount, MLCC", Packaging="Cut Tape (CT)", Part Description="4.7µF ±20% 6.3V X5R Ceramic Capacitor -55°C ~ 85°C Surface Mount, MLCC 0402 (1005 Metric) 0.039\" L x 0.020\" W (1.00mm x 0.50mm)", RoHS="RoHS Compliant", Size / Dimension="0.039\" L x 0.020\" W (1.00mm x 0.50mm)", Supplier 1=Digi-Key, Thickness (Max)="0.022\" (0.55mm)"
C70 C99 C116 C121 C134 C143 C151 C196 C198: library part Cap_0603, Capacitance=10µF, Manufacturer=Yageo, Manufacturer Part Number 1=CC0603MRX5R5BB106, Package / Case="0603 (1608 Metric)", Supplier Part Number 1=311-1448-2-ND, Tolerance=±20%, Voltage - Rated=6.3V, Category=Capacitors, Part Description="10µF ±20% 6.3V X5R Ceramic Capacitor -55°C ~ 85°C Surface Mount, MLCC 0603 (1608 Metric) 0.063\" L x 0.031\" W (1.60mm x 0.80mm)", Supplier 1=Digi-Key
C98 C101 C103 C105 C106 C107 C108 C110 C112 C114 C118 C120 C123 C125 C126 C127 C128 C136 C138 C140 C142 C145 C147 C149: library part Cap_0402, Capacitance="0.1 uF", Case Code - in=0201, Case Code - mm=0603, Dielectric=X6S, Manufacturer=Murata, Manufacturer Part Number 1=GRT033C81A104KE01D, Maximum Operating Temperature="+ 125 C", Minimum Operating Temperature="- 55 C", Package / Case="0201 (0603 metric)", Supplier Part Number 1=490-12232-1-ND, Tolerance="10 %", Voltage Rating DC="10 VDC", Brand="Murata Electronics", Category="Multilayer Ceramic Capacitors MLCC - SMD/SMT", Height="0.3 mm", Length="0.6 mm", Minimum Order Quantity=1, Packaging=Reel, Part Description="0.1 µF ±10% 10V Ceramic Capacitor X6S 0201 (0603 Metric)", Product="General Type MLCCs", Product Status="New Product", Reeling=True, RoHS="RoHS Compliant", RoHS - Mouser=Y, Series=GRM, Supplier 1=Digi-Key, Termination Style=SMD/SMT, Type="Voltage and Temperature Derating Recommended Product", Width="0.3 mm"
C129 C132 C133 C156 C174 C175 C180 C181 C195 C201: library part Cap_0603, Capacitance="0.1 uF", Case Code - in=0402, Case Code - mm=1005, Case Height="0.5 mm", Case Length="1 mm", Dielectric=X7R, Manufacturer="Murata Electronics", Manufacturer Part Number=GRM155R71C104KA88D, Maximum Operating Temperature="+ 125 C", Minimum Operating Temperature="- 55 C", Operating Temperature Range="- 55 C to + 125 C", Package / Case="0402 (1005 metric)", Supplier Part Number 1=81-GRM155R71C104KA88, Temperature Coefficient / Code="+/- 15 %", Tolerance="10 %", Voltage Rating DC="16 V", Brand="Murata Electronics", Case Width="0.5 mm", Category="Multilayer Ceramic Capacitors MLCC - SMD/SMT", Manufacturer Part Number 1=GRM155R71C104KA88D, Minimum Order Quantity=1, Packaging=Reel, Part Description="0.10µF ±10% 16V X7R Ceramic Capacitor -55°C ~ 125°C Surface Mount, MLCC 0402 (1005 Metric) 0.039\" L x 0.020\" W (1.00mm x 0.50mm)", Product="General Type MLCCs", Product Category="Low & Medium Capacitance SMD Ceramic Chip Capacitors", Reeling=True, RoHS="RoHS Compliant", RoHS - Mouser=Y, Series=GRM, Standard Pack Qty=10000, Supplier 1=Mouser, Termination Style=SMD/SMT, Type="General Purpose MLCC"
  C174 C180: Assembly Info=NF
C130 C131: library part Cap_0402, Capacitance=10, Capacitance Tolerance="± 5%", Capacitor Case Style="0402 [1005 Metric]<!--FANDB--><div class=\"features-and-benefits-container\"></div>", Ceramic Capacitor Case="0402 [1005 Metric]", Manufacturer=AVX, Manufacturer Part Number 1=04023A100JAT2A, Operating Temperature Max=125, Operating Temperature Min=-55, Supplier Part Number 1=2332478RL, Voltage Rating=25, Capacitance Tolerance ±="± 5%", MSL="MSL 1 - Unlimited", Packaging="Cut Tape", Part Description="10pF ±5% 25V C0G, NP0 Ceramic Capacitor -55°C ~ 125°C Surface Mount, MLCC 0402 (1005 Metric) 0.039\" L x 0.020\" W (1.00mm x 0.50mm)", Supplier 1=Farnell
C157: library part Cap_0402, Capacitance=0.018µF, Manufacturer=Yageo, Manufacturer Part Number 1=CC0402KRX7R7BB183, Operating Temperature="-55°C ~ 125°C", Package / Case="0402 (1005 Metric)", Supplier Part Number 1=311-1706-1-ND, Temperature Coefficient=X7R, Tolerance=±10%, Voltage - Rated=16V, Applications="General Purpose", Assembly Info=NF, Category=Capacitors, Mounting Type="Surface Mount, MLCC", Packaging="Cut Tape (CT)", Part Description="CAP CER 0.018UF 16V X7R 0402", Part Status=Active, RoHS="RoHS Compliant", Size / Dimension="0.039\" L x 0.020\" W (1.00mm x 0.50mm)", Supplier 1=Digi-Key, Thickness (Max)="0.022\" (0.55mm)"
C176 C177 C188 C189: library part Cap_0603, Capacitance="22 uF", Case Code - in=0603, Case Code - mm=1608, Manufacturer="TDK Corporation", Manufacturer Part Number 1=C1608X5R1A226M080AC, Operating Temperature Range="- 55 C to + 85 C", Package / Case="0603 (1608 metric)", Supplier Part Number 1=810-C1608X5R1A226M, Temperature Coefficient / Code="+/- 15 %", Tolerance="20 %", Voltage Rating DC="10 V", Brand=TDK, Category="Multilayer Ceramic Capacitors MLCC - SMD/SMT", Part Description="22µF ±20% 10V X5R Ceramic Capacitor -55°C ~ 85°C Surface Mount, MLCC 0603 (1608 Metric) 0.063\" L x 0.031\" W (1.60mm x 0.80mm)", Supplier 1=Mouser, Type="Multilayer Ceramic Chip Capacitor"
C182: library part Cap_0402, Capacitance=16pF, Case/Package=0402, Case Code (Metric)=1005, Dielectric=C0G, Manufacturer=Yageo, Manufacturer Part Number 1=CC0402JRNPO9BN160, Max Operating Temperature=125°C, Min Operating Temperature=-55°C, Resistor Type=Ceramic, Supplier Part Number 1=311-1662-1-ND, Tolerance=5%, Voltage Rating=50V, Case Code (Imperial)=0402, ComponentLink1Description=http://www.mouser.com/ds/2/447/Yageo_UPY-GP_NP0_16V-to-50V_9-358835.pdf?src-supplier=Mouser, ComponentLink1URL=http://www.mouser.com/ds/2/447/Yageo_UPY-GP_NP0_16V-to-50V_9-358835.pdf?src-supplier=Mouser, ComponentLink2Description=http://www.yageo.com/documents/recent/UPY-GP_NP0_16V-to-50V_16.pdf?src-supplier=Digi-Key, ComponentLink2URL=http://www.yageo.com/documents/recent/UPY-GP_NP0_16V-to-50V_16.pdf?src-supplier=Digi-Key, Depth=0.5mm, Lead Free="Lead Free", Length=0.039inch, Mount="Surface Mount", Packaging="Tape and Reel", Part Description="16 pF ±5% 50V Ceramic Capacitor C0G, NP0 0402 (1005 Metric)", Pricing 1="1=0,10000, 10=0,03700, 50=0,02020, 100=0,01640, 500=0,01174, 1000=0,00922, 2500=0,00838, 5000=0,00771 (USD)", RoHS=Yes, RoHS Compliant=Yes, Series=CC, Stock 1=168271, Supplier 1=Digi-Key, Termination=SMD/SMT, Thickness=0.022inch, Voltage Rating (DC)=50V, Weight=2.3E-05oz, Width=0.02inch
C183 C186: library part Cap_0603, Capacitance="0.1 uF", Case Code - in=0402, Case Code - mm=1005, Case Height="0.5 mm", Case Length="1 mm", Dielectric=X7R, Manufacturer="Murata Electronics", Manufacturer Part Number 1=GRM155R71C104KA88D, Maximum Operating Temperature="+ 125 C", Minimum Operating Temperature="- 55 C", Operating Temperature Range="- 55 C to + 125 C", Package / Case="0402 (1005 metric)", Supplier Part Number 1=81-GRM155R71C104KA88, Temperature Coefficient / Code="+/- 15 %", Tolerance="10 %", Voltage Rating DC="16 V", Assembly Info=NF, Brand="Murata Electronics", Case Width="0.5 mm", Category="Multilayer Ceramic Capacitors MLCC - SMD/SMT", Minimum Order Quantity=1, Packaging=Reel, Part Description="0.10µF ±10% 16V X7R Ceramic Capacitor -55°C ~ 125°C Surface Mount, MLCC 0402 (1005 Metric) 0.039\" L x 0.020\" W (1.00mm x 0.50mm)", Product="General Type MLCCs", Product Category="Low & Medium Capacitance SMD Ceramic Chip Capacitors", Reeling=True, RoHS="RoHS Compliant", RoHS - Mouser=Y, Series=GRM, Standard Pack Qty=10000, Supplier 1=Mouser, Termination Style=SMD/SMT, Type="General Purpose MLCC"
C184: library part Cap_0402, Capacitance="1000 pF", Case Code - in=0402, Case Code - mm=1005, Case Height="0.5 mm", Case Length="1 mm", Dielectric=X7R, Manufacturer="Murata Electronics", Manufacturer Part Number 1=GCM155R71H102KA37D, Maximum Operating Temperature="+ 125 C", Minimum Operating Temperature="- 55 C", Operating Temperature Range="- 55 C to + 125 C", Package / Case="0402 (1005 metric)", Supplier Part Number 1=81-GCM155R71H102KA7D, Temperature Coefficient / Code="+/- 15 %", Tolerance="10 %", Voltage Rating DC="50 V", Assembly Info=NF, Brand="Murata Electronics", Case Width="0.5 mm", Category="Multilayer Ceramic Capacitors MLCC - SMD/SMT", Minimum Order Quantity=1, Packaging=Reel, Part Description="1000pF ±10% 50V X7R Ceramic Capacitor -55°C ~ 125°C Surface Mount, MLCC 0402 (1005 Metric) 0.039\" L x 0.020\" W (1.00mm x 0.50mm)", Product="Automotive MLCCs", Product Category="Automotive Ceramic Chip Capacitors", Reeling=True, RoHS="RoHS Compliant", RoHS - Mouser=Y, Series=GCM, Standard Pack Qty=10000, Supplier 1=Mouser, Termination Style=SMD/SMT, Type="Automotive Ultra Small MLCC"
C193: library part Cap_0402, Manufacturer="Taiyo Yuden", Manufacturer Part Number 1=UMK105CH820JVHF, Supplier Part Number 1=587-5099-1-ND, Part Description="82 pF ±5% 50V Ceramic Capacitor CH 0402 (1005 Metric)", Pricing 1="1=0,10000, 10=0,03000, 50=0,01640, 100=0,01340, 500=0,00954, 1000=0,00750, 2500=0,00682, 5000=0,00627 (USD)", RoHS=Yes, Stock 1=10720, Supplier 1=Digi-Key
ESD1 ESD2 ESD4 ESD5: Capacitance @ Frequency="0.2pF @ 1MHz", Current - Peak Pulse (10/1000µs)="3A (8/20µs)", Manufacturer="ON Semiconductor", Manufacturer Part Number 1=ESD8472MUT5G, Operating Temperature="-55°C ~ 150°C (TJ)", Package / Case=2-XFDFN, Power - Peak Pulse=-, Power Line Protection=No, Supplier Device Package="2-X3DFN (0.62x0.32)", Supplier Part Number 1=ESD8472MUT5GOSCT-ND, Voltage - Breakdown (Min)=7V, Voltage - Clamping (Max) @ Ipp=14V, Voltage - Reverse Standoff (Typ)="5.3V (Max)", Applications="Automotive, RF Antenna", Category="Circuit Protection", ComponentLink1Description=http://www.onsemi.com/pub/Collateral/ESD8472-D.PDF, ComponentLink1URL=http://www.onsemi.com/pub/Collateral/ESD8472-D.PDF, Mounting Type="Surface Mount", Packaging="Cut Tape (CT)", Part Description="TVS DIODE 5.3VWM 14VC X3DFN2", Part Status=Active, Pricing 1="1=0.39, 10=0.315, 100=0.2142, 500=0.16068, 1000=0.12051 (USD)", RoHS="RoHS Compliant", Stock 1=2295, Supplier 1=Digi-Key, Type=Zener
  ESD1 ESD2: Assembly Info=NF
ESD3: Capacitance @ Frequency="0.15pF @ 1MHz", Current - Peak Pulse (10/1000µs)="1A (8/20µs)", Manufacturer="ON Semiconductor", Manufacturer Part Number 1=ESD7016MUTAG, Operating Temperature="-55°C ~ 125°C (TJ)", Package / Case=8-UFSFN, Power - Peak Pulse=-, Power Line Protection=No, Supplier Device Package="8-UDFN (3.3x1.0)", Supplier Part Number 1=ESD7016MUTAGOSDKR-ND, Voltage - Breakdown (Min)=5.5V, Voltage - Clamping (Max) @ Ipp=10V, Voltage - Reverse Standoff (Typ)="5V (Max)", Applications="General Purpose", Bidirectional Channels=-, Category="Circuit Protection", Mounting Type="Surface Mount", Packaging=Digi-Reel®, Part Description="TVS DIODE 5VWM 10VC 8UDFN", RoHS="RoHS Compliant", Supplier 1=Digi-Key, Type=Zener, Unidirectional Channels=8
FR1 FR2 FR3 FR4 FR5 FR6 FR7 FR8 FR9 FR10 FR11 FR12 FR13 FR14 FR15 FR16 FR17 FR18 FR19 FR20 FR21 FR24 FR26 FR27 FR28 FR29 FR30 FR31 FR32 FR33 FR34 FR38 FR39 FR40 FR41 FR42: library part Ferrite, Current Rating=270mA, DC Resistance (DCR)="750 mOhm Max", Impedance @ Frequency="600 Ohm @ 100MHz", Manufacturer="Taiyo Yuden", Manufacturer Part Number 1=BK0603TS601-T, Package / Case="0201 (0603 Metric)", Supplier Part Number 1=587-3277-1-ND, Category=Filters, Filter Type="Differential Mode - Single", Height (Max)="0.013\" (0.33mm)", Mounting Type="Surface Mount", Packaging="Cut Tape (CT)", Part Description="FERRITE BEAD 600 OHM 0201 1LN", RoHS="RoHS Compliant", Size / Dimension="0.024\" L x 0.012\" W (0.60mm x 0.30mm)", Supplier 1=Digi-Key
  FR42: Assembly Info=NF
FR22 FR25 FR35 FR37 FR44 FR45: library part Ferrite, Current Rating=900mA, DC Resistance (DCR)="220 mOhm Max", Impedance @ Frequency="220 Ohm @ 100MHz", Manufacturer="TDK Corporation", Manufacturer Part Number 1=MPZ1005S221ET000, Package / Case="0402 (1005 Metric)", Supplier Part Number 1=445-9329-2-ND, Category=Filters, Part Description="FERRITE BEAD 220 OHM 0402 1LN", Supplier 1=Digi-Key
FR23 FR36: library part Ferrite, Current Rating=2A, DC Resistance (DCR)="100 mOhm Max", Impedance @ Frequency="600 Ohm @ 100MHz", Manufacturer="TDK Corporation", Manufacturer Part Number 1=MPZ2012S601AT000, Package / Case="0805 (2012 Metric)", Supplier Part Number 1=445-2206-2-ND, Category=Filters, Filter Type="Differential Mode - Single", Height (Max)="0.041\" (1.05mm)", Mounting Type="Surface Mount", Packaging="Tape & Reel (TR)", Part Description="FERRITE BEAD 600 OHM 0805 1LN", RoHS="RoHS Compliant", Size / Dimension="0.079\" L x 0.049\" W (2.00mm x 1.25mm)", Supplier 1=Digi-Key
IC1: library part LMS7002Mr4, "Schematic symbol revision 4. Default footprint - 0.31mm pad", Manufacturer="Lime Microsystems", Manufacturer Part Number 1=LMS7002M, Part Description="IC FPRF Transceiver LMS7002M; 261 pin aQFN", Supplier 1="Lime Microsystems", Supplier Part Number 1=LMS7002M
IC2 IC12: library part M24128-DFMC6TG, Manufacturer=STMicroelectronics, Operating Temperature="-40°C ~ 85°C (TA)", Package / Case="8-UFDFN Exposed Pad", Supplier Device Package="8-UFDFPN (2x3)", Supplier Part Number 1=497-15739-1-ND, Voltage - Supply="1.7 V ~ 5.5 V", Assembly Info=NF, Category="Integrated Circuits (ICs)", ComponentLink1Description=http://www.st.com/content/ccc/resource/technical/document/datasheet/59/05/c9/5b/7b/41/48/b6/CD00259167.pdf/files/CD00259167.pdf/jcr:content/translations/en.CD00259167.pdf, ComponentLink1URL=http://www.st.com/content/ccc/resource/technical/document/datasheet/59/05/c9/5b/7b/41/48/b6/CD00259167.pdf/files/CD00259167.pdf/jcr:content/translations/en.CD00259167.pdf, Manufacturer Part Number 1=M24128-DFMC6TG, Memory Format=EEPROM, Memory Interface=I²C, Memory Size="128Kb (16K x 8)", Memory Type=Non-Volatile, Mounting Type="Surface Mount", Packaging="Cut Tape (CT)", Part Description="EEPROM Memory IC 128Kb (16K x 8) I²C 1MHz 450ns 8-UFDFPN (2x3)", Part Status=Active, Pricing 1="1=0.35, 10=0.348, 100=0.2854, 500=0.27748, 1000=0.27004 (USD)", RoHS="RoHS Compliant", Stock 1=5894, Supplier 1=Digi-Key, Technology=EEPROM, Write Cycle Time - Word, Page=5ms
IC3 IC4: Frequency - Lower=100MHz, Insertion Loss @ Frequency="0.9dB @ 6GHz", Isolation @ Frequency="14dB @ 6GHz (typ)", Manufacturer="Skyworks Solutions Inc.", Operating Temperature="-40°C ~ 85°C", Package / Case="6-XFDFN Exposed Pad", Supplier Device Package="6-MLPD (1.5x1.5)", Supplier Part Number 1=863-1455-1-ND, Voltage - Supply=-, Category="RF/IF and RFID", Circuit=DPDT, ComponentLink1Description=http://www.skyworksinc.com/uploads/documents/201665B.pdf, ComponentLink1URL=http://www.skyworksinc.com/uploads/documents/201665B.pdf, Features=-, IIP3="50dBm (typ)", Impedance="50 Ohm", Manufacturer Part Number 1=SKY13411-374LF, P1dB="30dBm (typ) IP1dB", Packaging="Cut Tape (CT)", Part Description="RF Switch IC 802.11a/b/g/n DPDT 50 Ohm 6-MLPD (1.5x1.5)", Part Status=Active, Pricing 1="1=0.88, 10=0.782, 100=0.6099, 500=0.50382, 1000=0.39776 (USD)", RF Type=802.11a/b/g/n, RoHS="RoHS Compliant", Stock 1=18782, Supplier 1=Digi-Key, Topology=Reflective
IC5 IC6 IC13 IC18: Current - Output=1A, Current - Supply="50µA ~ 300µA", Manufacturer=STMicroelectronics, Operating Temperature="-40°C ~ 125°C", Package / Case="6-VDFN Exposed Pad", Supplier Device Package="6-DFN (3x3)", Supplier Part Number 1=497-11013-1-ND, Voltage - Input (Max)=5.5V, Voltage - Output (Max)=4.6V, Voltage - Output (Min/Fixed)=0.8V, Voltage Dropout (Max)="0.4V @ 1A", Category="Integrated Circuits (ICs)", ComponentLink1Description=http://www.st.com/content/ccc/resource/technical/document/datasheet/72/02/e5/ee/df/36/40/5e/CD00233788.pdf/files/CD00233788.pdf/jcr:content/translations/en.CD00233788.pdf, ComponentLink1URL=http://www.st.com/content/ccc/resource/technical/document/datasheet/72/02/e5/ee/df/36/40/5e/CD00233788.pdf/files/CD00233788.pdf/jcr:content/translations/en.CD00233788.pdf, Control Features="Enable, Power Good", Manufacturer Part Number 1=LD39100PUR, Mounting Type="Surface Mount", Output Configuration=Positive, Output Type=Adjustable, Packaging="Cut Tape (CT)", Part Description="Linear Voltage Regulator IC Positive Adjustable Output 0.8 V ~ 4.5 V 1A 6-DFN (3x3)", Part Status=Active, Pricing 1="1=0.85, 10=0.76, 100=0.5923, 500=0.48926, 1000=0.38625 (USD)", Protection Features="Over Current, Over Temperature, Short Circuit", PSRR="70dB ~ 65dB (1kHz ~ 10kHz)", RoHS="RoHS Compliant", Stock 1=27970, Supplier 1=Digi-Key
IC7: library part LFE5U-25F-MG285, Case/Package=TFBGA, Manufacturer="Lattice Semiconductor", Manufacturer Part Number 1=LFE5U-45F-6MG285C, Max Operating Temperature=85°C, Min Operating Temperature=0°C, Supplier Part Number 1=LFE5U-45F-6MG285C-ND, ComponentLink1Description=http://www.latticesemi.com/view_document?document_id=50461&src-supplier=Digi-Key, ComponentLink1URL=http://www.latticesemi.com/view_document?document_id=50461&src-supplier=Digi-Key, Mount="Surface Mount", Number of I/Os=118, Number of Logic Blocks (LABs)=11000, Number of Logic Elements/Cells=44000, Part Description="series Field Programmable Gate Array (FPGA) IC 118 1990656 44000 285-LFBGA, CSPBGA", Pricing 1="168=15,73000 (USD)", RAM Size=1990656b, RoHS=Yes, RoHS Compliant=No, Stock 1=0, Supplier 1=Digi-Key
IC8: Current - Supply=-, Manufacturer="FTDI, Future Technology Devices International Ltd", Manufacturer Part Number 1=FT601Q-B-T, Operating Temperature="-40°C ~ 85°C", Package / Case="76-VFQFN Exposed Pad", Supplier Device Package="76-QFN (9x9)", Supplier Part Number 1=768-1311-ND, Voltage - Supply="1.65 V ~ 3.6 V", Category="Integrated Circuits (ICs)", Function="Bridge, USB to FIFO", Interface=FIFO, Packaging=Tray, Part Description="IC USB3-32BIT SYNC FIFO 76QFN", Protocol=USB, RoHS="RoHS Compliant", Standards="USB 3.0", Supplier 1=Digi-Key
IC9: Frequency - Max=200MHz, Manufacturer="Texas Instruments", Manufacturer Part Number 1=LMK00101SQE/NOPB, Operating Temperature="-40°C ~ 85°C", Package / Case="32-WFQFN Exposed Pad", Supplier Device Package="32-WQFN (5x5)", Supplier Part Number 1=296-39036-1-ND, Voltage - Supply="2.375 V ~ 3.45 V", Category="Integrated Circuits (ICs)", Differential - Input:Output=Yes/No, Input="HCSL, LVCMOS, LVDS, LVPECL, LVTTL, SSTL, Crystal", Mounting Type="Surface Mount", Number of Circuits=1, Output="LVCMOS, LVTTL", Packaging="Cut Tape (CT)", Part Description="Clock Fanout Buffer (Distribution), Multiplexer, Translator IC 200MHz 32-WFQFN Exposed Pad", Ratio - Input:Output=3:10, RoHS="RoHS Compliant", Supplier 1=Digi-Key, Type="Fanout Buffer (Distribution), Multiplexer, Translator"
IC10: Manufacturer="NXP Semiconductors", Manufacturer Part Number 1=LM75BTP,147, Operating Temperature="-55°C ~ 125°C", Package / Case="8-WFDFN Exposed Pad", Sensing Temperature - Remote=-, Supplier Device Package="8-HWSON (2x3)", Supplier Part Number 1=568-9815-2-ND, Voltage - Supply="2.8 V ~ 5.5 V", Accuracy - Highest (Lowest)="±2°C (±3°C)", Category="Sensors, Transducers", Features="Output Switch, Programmable Limit, Shutdown Mode", Output Type=I²C, Packaging="Tape & Reel (TR)", Part Description="SENSOR TEMPERATURE I2C 8HWSON", Resolution="10 b", RoHS="RoHS Compliant", Sensing Temperature - Local="-55°C ~ 125°C", Sensor Type="Digital, Local", Supplier 1=Digi-Key, Test Condition="-25°C ~ 100°C (-55°C ~ 125°C)"
IC11: library part AD5601BKSZ-REEL7, "Single 8-Bit nanoDAC with SPI Interface in LFCSP and SC70, 2.7 to 5.5 V, <100 uA, -40 to +125 degC, KS-6, Pb-Free, Reel", Case/Package=SC, Manufacturer="Texas Instruments", Manufacturer Part Number 1=DAC6311IDCKT, Max Operating Temperature=125°C, Max Power Dissipation=880uW, Max Supply Voltage=5.5V, Min Operating Temperature=-40°C, Min Supply Voltage=1.8V, Nominal Supply Current=110uA, Operating Supply Voltage=5V, Package Quantity=1, Supplier Part Number 1=296-23716-1-ND, ComponentLink1Description=http://www.ti.com/lit/ds/symlink/dac5311.pdf, ComponentLink1URL=http://www.ti.com/lit/ds/symlink/dac5311.pdf, ComponentLink2Description=https://datasheet.ciiva.com/1362/dac7311-1362880.pdf?src-supplier=Digi-Key, ComponentLink2URL=https://datasheet.ciiva.com/1362/dac7311-1362880.pdf?src-supplier=Digi-Key, ComponentLink3Description=https://datasheet.ciiva.com/4779/sbas442a-125649-4779152.pdf?src-supplier=Mouser, ComponentLink3URL=https://datasheet.ciiva.com/4779/sbas442a-125649-4779152.pdf?src-supplier=Mouser, ComponentLink4Description=https://datasheet.ciiva.com/1494/1833965-1494412.pdf?src-supplier=Element14, ComponentLink4URL=https://datasheet.ciiva.com/1494/1833965-1494412.pdf?src-supplier=Element14, ComponentLink5Description=https://datasheet.ciiva.com/1503/dac5311-1503186.pdf?src-supplier=Farnell, ComponentLink5URL=https://datasheet.ciiva.com/1503/dac5311-1503186.pdf?src-supplier=Farnell, ComponentLink6Description=https://datasheet.ciiva.com/46391/1833965-46391478.pdf?src-supplier=Element14, ComponentLink6URL=https://datasheet.ciiva.com/46391/1833965-46391478.pdf?src-supplier=Element14, ComponentLink7Description=https://datasheet.ciiva.com/1368/dac5311-1368577.pdf?src-supplier=Digi-Key, ComponentLink7URL=https://datasheet.ciiva.com/1368/dac5311-1368577.pdf?src-supplier=Digi-Key, ComponentLink8Description=https://datasheet.ciiva.com/1368/dac5311-1368578.pdf?src-supplier=Digi-Key, ComponentLink8URL=https://datasheet.ciiva.com/1368/dac5311-1368578.pdf?src-supplier=Digi-Key, ComponentLink9Description=https://datasheet.ciiva.com/15146/getdatasheetpartid-213912-15146949.pdf?src-supplier=Verical, ComponentLink9URL=https://datasheet.ciiva.com/15146/getdatasheetpartid-213912-15146949.pdf?src-supplier=Verical, Contact Plating=Gold, Conversion Rate=225KS/s, Differential Nonlinearity=0.5LSB, Height=0.9mm, Integral Nonlinearity (INL)=0.5LSB, Interface=SPI, Lead Free="Lead Free", Length=2mm, Number of Bits=10, Number of Channels=1, Number of Converters=1, Number of D/A Converters=1, Number of DAC Channels=1, Number of Pins=6, Output Type=Voltage, Packaging="Tape and Reel", Part Description="10 Bit Digital to Analog Converter 1 SC-70-6", Polarity=Unipolar, Pricing 1="1=2,37000, 10=2,13100, 25=2,01000, 100=1,71250 (USD)", Radiation Hardening=No, REACH SVHC="No SVHC", Resolution=10b, RoHS=Yes, RoHS Compliant=Yes, Sampling Rate=225KS/s, Settling Time=6us, Signal to Noise Ratio (SNR)=81dB, Spurious-free dynamic range (SFDR)=65dB, Stock 1=13410, Supplier 1=Digi-Key, Supply Type=Single, Termination=SMD/SMT, Width=1.25mm